# EAGLE board arena-shield (EAGLE 7.6.0)
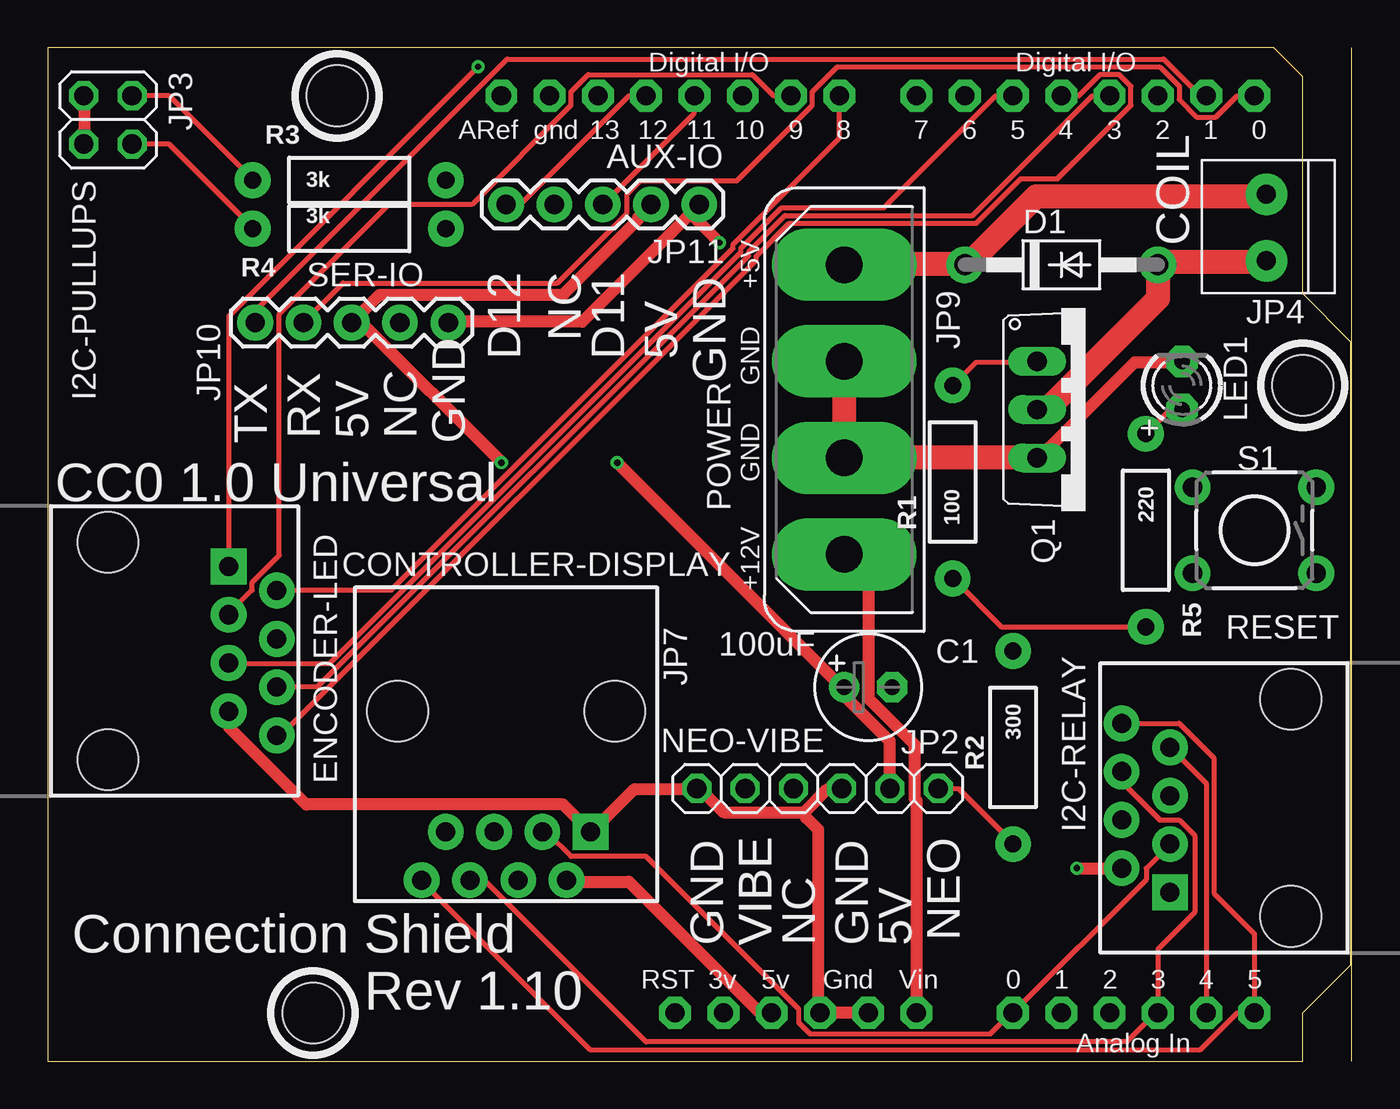
[diagram p0: board, top side]
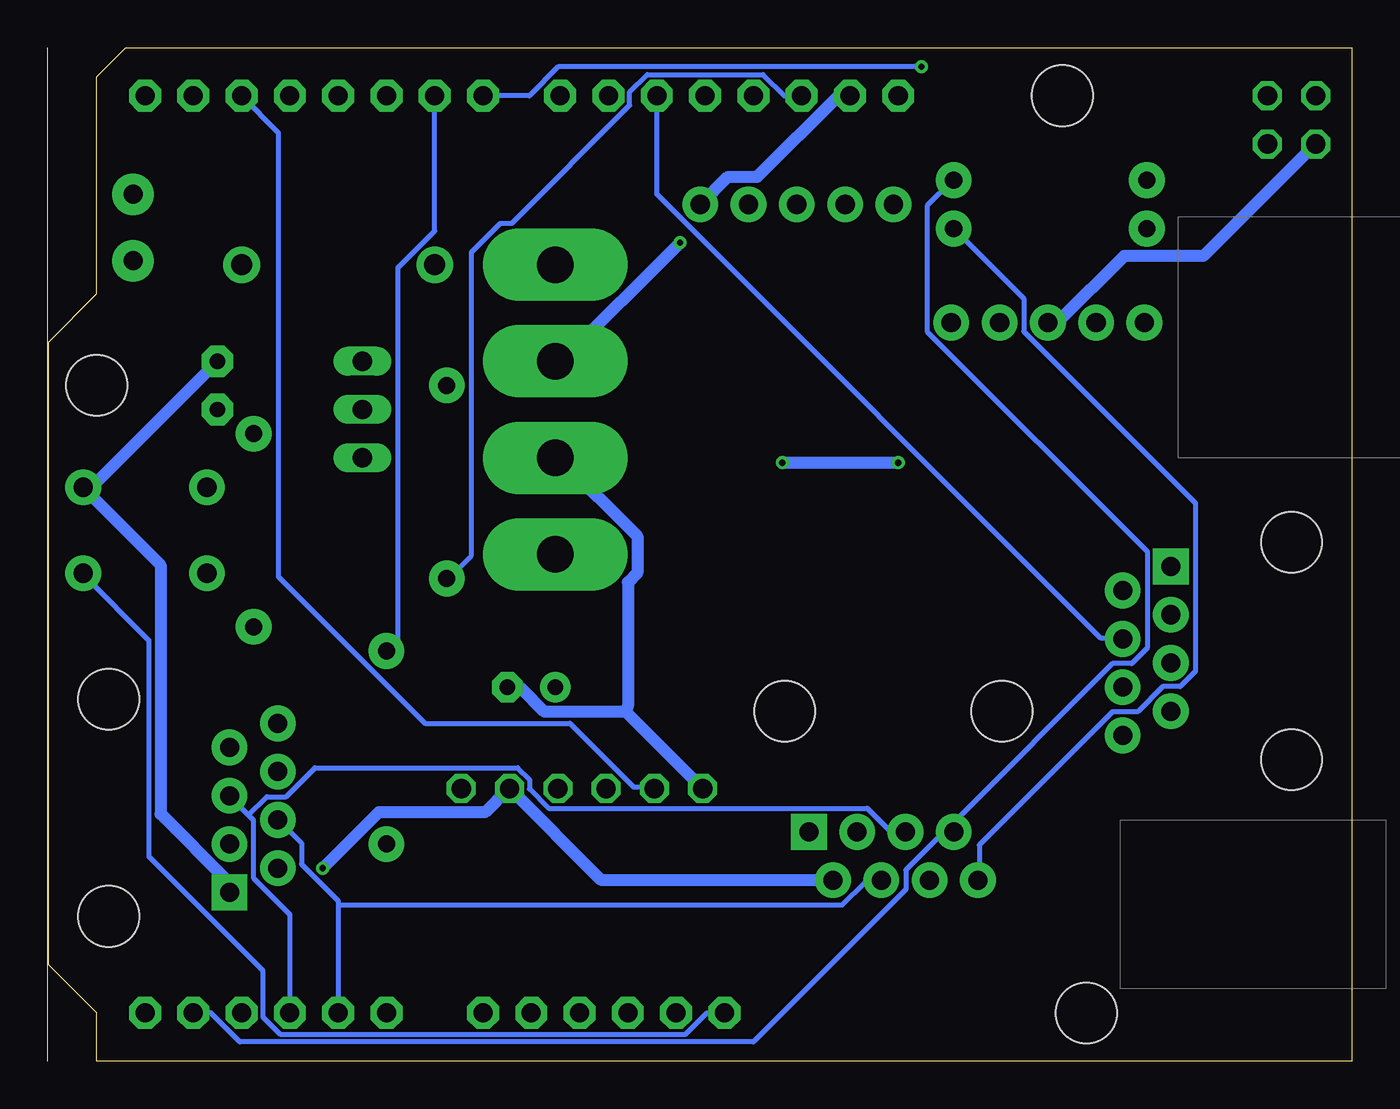
[diagram p1: board, bottom side, seen from below]

Size 68.63 x 53.34 mm. Coordinates in mm from the lower left corner, seen from the top.
Outline: 68.63,0 68.63,53.33
Outline: 0,53.33 0,0
Copper layers (1*16): Top 0.0356mm / dielectric 1.5011mm / Bottom 0.0356mm
Design rules "LaenPCBOrder": minimum track width 6mil, minimum drill 13mil, track to track 6mil, track to pad 6mil, pad to pad 6mil, via to via 6mil, smd to smd 6mil, copper to edge 15mil, drill to drill 6mil, minimum pad ring 7mil, minimum via ring 7mil, stop-mask expansion 3mil, vias tented up to drill 0mil, thermal gap 10mil
Net classes: 0 default: width 0.254 mm; 1 power: width 0.635 mm; 2 coil: width 1.27 mm

## Footprints (pad centres in the part's own frame; a part is rotated, then mirrored left to right if it is on the bottom)
E2,5-6 = drill 0.813 pad 1.6: + -1.27,0 | drill 0.813 pad 1.6 octagon: - 1.27,0
DO41-10 = drill 1.118 pad 1.93: A 5.08,0; C -5.08,0
1X06 = drill 1.016 octagon: 1 -6.35,0; 2 -3.81,0; 3 -1.27,0; 4 1.27,0; 5 3.81,0; 6 6.35,0
2X02 = drill 1.016 octagon: 1 -1.27,-1.27; 2 -1.27,1.27; 3 1.27,-1.27; 4 1.27,1.27
1X2-3.5MM = drill 1 pad 2.184: 1 1.8,0; 2 -1.7,0
RJ45-8 = drill 1 pad 1.88 square: 1 -4.445,6.35 | drill 1 pad 1.88: 2 -3.175,8.89; 3 -1.905,6.35; 4 -0.635,8.89; 5 0.635,6.35; 6 1.905,8.89; 7 3.175,6.35; 8 4.445,8.89 | hole 3.2: -5.715,0; 5.715,0
RJ45-UPRIGHT = drill 1 pad 1.88 square: 1 -4.445,5.08 | drill 1 pad 1.88: 2 -3.175,7.62; 3 -1.905,5.08; 4 -0.635,7.62; 5 0.635,5.08; 6 1.905,7.62; 7 3.175,5.08; 8 4.445,7.62 | hole 3.2: -5.715,-1.27; 5.715,-1.27
FLOPPY-4 = drill 1.93 pad 3.81 long: 1 7.62,0; 2 2.54,0; 3 -2.54,0; 4 -7.62,0
1X05 = drill 1.016 pad 1.88: 1 0,0; 2 2.54,0; 3 5.08,0; 4 7.62,0; 5 10.16,0
LED3MM = drill 0.813 pad 1.676 octagon: A -1.27,0; K 1.27,0
TO220V = drill 1.016 long: 1 -2.54,-2.54; 2 0,-2.54; 3 2.54,-2.54
AXIAL-0.4 = drill 0.9 pad 1.88: P$1 -5.08,0; P$2 5.08,0
TACTILE-PTH = drill 1.016 pad 1.88: 1 -3.251,2.261; 2 3.251,2.261; 3 -3.251,-2.261; 4 3.251,-2.261
ARDUINO = drill 1 pad 1.676 octagon: 3V 35.56,2.54; 5V 38.1,2.54; A0 50.8,2.54; A1 53.34,2.54; A2 55.88,2.54; A3 58.42,2.54; A4 60.96,2.54; A5 63.5,2.54; AREF 23.876,50.8; D0 63.5,50.8; D1 60.96,50.8; D2 58.42,50.8; D3 55.88,50.8; D4 53.34,50.8; D5 50.8,50.8; D6 48.26,50.8; D7 45.72,50.8; D8 41.656,50.8; D9 39.116,50.8; D10 36.576,50.8; D11 34.036,50.8; D12 31.496,50.8; D13 28.956,50.8; GND 26.416,50.8; GND1 43.18,2.54; GND2 40.64,2.54; RESET 33.02,2.54; VIN 45.72,2.54 | hole 3.2: 15.24,50.8; 66.04,35.56; 13.97,2.54

## Placement (x,y rotation side)
C1  100uF  [E2,5-6]  43.18,19.68 0 top
D1  1N4004  [DO41-10]  53.34,41.91 0 top
JP2  NEO-VIBE  [1X06]  40.51,14.35 0 top
JP3  I2C-PULLUPS  [2X02]  3.17,49.53 270 top
JP4  COIL  [1X2-3.5MM]  64.14,43.81 90 top
JP6  ENCODER-LED  [RJ45-8]  3.17,21.59 270 top
JP7  CONTROLLER-DISPLAY  [RJ45-UPRIGHT]  24.13,17.14 180 top
JP8  I2C-RELAY  [RJ45-8]  65.41,13.34 90 top
JP9  POWER  [FLOPPY-4]  41.91,34.29 90 top
JP10  SER-IO  [1X05]  21.08,38.86 180 top
JP11  AUX-IO  [1X05]  34.29,45.09 180 top
LED1  MAGNET  [LED3MM]  59.69,35.56 90 top
Q1  IRLB8721PbF  [TO220V]  54.61,34.29 270 top
R1  100  [AXIAL-0.4]  47.62,30.48 90 top
R2  300  [AXIAL-0.4]  50.8,16.51 270 top
R3  3k  [AXIAL-0.4]  15.88,46.35 0 top
R4  3k  [AXIAL-0.4]  15.88,43.81 0 top
R5  220  [AXIAL-0.4]  57.78,27.94 270 top
S1  RESET  [TACTILE-PTH]  63.5,27.94 180 top
U$1  ARDUINOUNO  [ARDUINO]  0,0 0 top

## Library data of the parts
C1 = rcl
D1 JP2 JP4 LED1 Q1 U$1 = adafruit
JP3 = pinhead
JP6 JP8 JP10 JP11 = SparkFun-Connectors
JP7 = PJS
JP9 = con-amp
R1-R5 = SparkFun-Resistors
S1 = SparkFun-Electromechanical

## Nets
3V: U$1.3V
12V_PS_POS [power]: JP9.4 U$1.VIN
+5V [power]: C1.+ JP2.5 JP3.1 JP3.3 JP7.2 JP8.2 JP10.3 JP11.2 U$1.5V
A0: JP7.3 JP8.3 U$1.A0
A1: JP7.4 JP8.4 U$1.A1
A2: JP7.5 JP8.5 U$1.A2
A3: JP7.6 JP8.6 U$1.A3
BLUE: JP6.4 U$1.D10
COIL_5V [coil]: D1.C JP4.1 JP9.1
COIL_RETURN [coil]: D1.A JP4.2 Q1.2
D11: JP11.3 U$1.D11
D12: JP11.5 U$1.D12
GND [power]: C1.- JP2.1 JP2.4 JP6.7 JP7.1 JP8.1 JP9.2 JP9.3 JP10.1 JP11.1 LED1.K Q1.3 S1.3 U$1.GND U$1.GND1 U$1.GND2
GREEN: JP6.3 U$1.D9
LED-SWITCH-COM: JP6.1 U$1.D7
N$6: R1.P$1 R5.P$2 U$1.D13
N$7: LED1.A R5.P$1
N$8: S1.1 U$1.RESET
N$9: JP3.4 R4.P$1
N$10: JP3.2 R3.P$1
N$17: Q1.1 R1.P$2
N$24: R2.P$1 U$1.D6
NEO-DATA: JP2.6 R2.P$2
PUSHBUTTON: JP6.5 U$1.D5
QUAD-A: JP6.8 U$1.D4
QUAD-B: JP6.6 U$1.D3
RED: JP6.2 U$1.D8
RX: JP10.4 U$1.D0
SCL: JP7.8 JP8.8 R4.P$2 U$1.A5
SDA: JP7.7 JP8.7 R3.P$2 U$1.A4
TX: JP10.5 U$1.D1
VIBRATE: JP2.2 U$1.D2

## Tracks (layer width: path | path; a pad name or v marks a point on that pad's centre or on a via)
12V_PS_POS
  Top 0.635: U$1.VIN 45.72,13.72 45.62,13.82 45.62,16.66 43.18,19.1 43.18,25.4 JP9.4
+5V  (via drill 0.33)
  Top 0.635: JP3.3 1.93,48.26 1.93,50.8 JP3.1 | JP11.2 31.7,45.01 31.09,44.4 31.09,44.3 27.13,40.34 17.48,40.34 JP10.3 16.46,38.91 v23.88,31.5 | U$1.5V 37.49,2.54 30.58,9.45 27.33,9.45 JP7.2 | JP2.5 44.3,14.43 44.3,16.87 41.96,19.2 41.96,19.61 C1.+ 41.66,19.81 v29.97,31.5 | v54.15,10.16 JP8.2
  Bottom 0.635: JP10.3 15.95,38.91 15.44,38.91 11.99,42.37 7.82,42.37 1.93,48.26 JP3.3 | v54.15,10.16 51.21,13.11 45.62,13.11 44.4,14.33 JP2.5 39.52,9.55 27.33,9.55 JP7.2 | v29.97,31.5 v23.88,31.5
A0
  Top 0.254: JP8.3 59.03,11.38 57.81,10.16 57.81,9.55 U$1.A0 50.7,2.54 49.58,1.42 40.13,1.42 39.52,2.03 39.52,2.74 31.5,10.77 27.53,10.77 26.31,11.99 26.11,11.99 JP7.3
A1
  Bottom 0.254: 53.34,8.23 53.34,8.43 55.27,10.36 55.27,11.48 56.49,12.7 JP8.4 | 53.34,8.23 U$1.A1 | 53.34,8.23 26.82,8.23 25.6,9.45 24.79,9.45 JP7.4
A2
  Bottom 0.254: U$1.A2 55.88,7.72 57.81,9.65 57.81,12.7 58.06,12.95 | 58.06,12.95 59.03,13.92 JP8.5 | 58.06,12.95 57.1,13.92 56.08,13.92 54.56,15.44 43.89,15.44 43.28,14.83 43.28,14.33 42.27,13.31 25.5,13.31 24.28,12.09 23.57,12.09 JP7.5
A3
  Top 0.254: JP8.6 56.59,15.24 56.59,14.63 58.52,12.7 59.54,12.7 60.35,11.89 60.35,7.82 58.42,5.89 U$1.A3 58.32,2.54 56.79,1.02 31.5,1.02 23.06,9.45 22.25,9.45 JP7.6
BLUE
  Bottom 0.254: U$1.D10 36.58,45.62 13.21,22.25 12.09,22.25 JP6.4
COIL_5V
  Top 1.27: JP9.1 41.96,41.96 48.26,41.96 D1.C 48.77,42.27 52.02,45.52 64.11,45.52 JP4.1
COIL_RETURN
  Top 1.27: Q1.2 52.12,34.34 52.63,34.34 58.42,40.13 D1.A 59.03,42.06 64.11,42.06 JP4.2
D11
  Top 0.254: U$1.D11 34.04,49.89 29.26,45.11 JP11.3
D12
  Top 0.254: U$1.D12 30.58,50.8 24.89,45.11 24.18,45.11 JP11.5
GND  (via drill 0.33)
  Top 0.635: U$1.GND1 U$1.GND2 40.54,2.85 40.54,12.19 39.93,12.8 39.83,13.11 | 39.83,13.11 41.05,14.33 41.76,14.33 JP2.4 | 39.83,13.11 35.56,13.11 34.44,14.22 JP2.1 34.14,14.33 30.89,14.33 28.65,12.09 JP7.1 27.13,13.51 13.61,13.51 9.55,17.58 9.55,18.39 JP6.7 | JP10.1 21.13,38.91 28.14,38.91 34.24,45.01 JP11.1 34.04,44.4 v35.36,43.08 | 52.02,31.8 Q1.3 52.32,31.9 57.2,36.78 59.64,36.78 LED1.K | 41.96,31.8 JP9.3 41.96,32.11 | 41.96,36.78 JP9.2
  Top 1.27: 41.96,36.78 41.91,36.78 JP9.3 | 41.96,31.8 52.07,31.8 Q1.3
  Bottom 0.635: 38.2,18.39 42.47,18.39 43.69,19.61 44.4,19.61 C1.- | JP2.1 38.2,18.39 | JP8.1 59.13,8.94 59.13,9.45 62.69,13.01 62.69,26.11 66.75,30.18 S1.3 66.34,30.18 LED1.K | U$1.GND 27.03,50.8 31.29,46.53 32.82,46.53 34.24,45.11 JP11.1 | v35.36,43.08 41.55,36.88 41.86,36.88 JP9.2 | 38.2,18.39 38.1,18.69 38.1,25.2 37.59,25.7 37.59,27.64 41.66,31.7 41.86,31.7 JP9.3
GREEN
  Top 0.254: U$1.D9 38.2,50.8 37.08,51.92 28.45,51.92 27.53,51 27.53,50.29 22.35,45.11 17.98,45.11 12.19,39.32 12.19,26.62 10.77,25.2 10.77,24.79 9.55,23.57 JP6.3
LED-SWITCH-COM  (via drill 0.33)
  Top 0.254: v22.66,52.32 9.55,39.22 9.55,26.11 JP6.1
  Bottom 0.254: U$1.D7 43.28,50.8 41.76,52.32 v22.66,52.32
N$6
  Top 0.254: R5.P$2 50.19,22.86 47.65,25.4 R1.P$1
  Bottom 0.254: U$1.D13 29.87,50.8 30.99,51.92 37.08,51.92 38,51 38,50.29 44.2,44.09 44.81,44.09 46.33,42.57 46.33,26.62 47.55,25.4 R1.P$1
N$7
  Top 0.254: LED1.A 59.64,34.24 59.03,34.24 57.81,33.02 R5.P$1
N$8
  Bottom 0.254: U$1.RESET 33.93,2.54 35.05,1.42 56.39,1.42 57.3,2.34 57.3,4.78 63.3,10.77 63.3,22.15 66.75,25.6 S1.1
N$9
  Top 0.254: JP3.4 6.4,48.26 10.77,43.89 R4.P$1
N$10
  Top 0.254: JP3.2 6.4,50.8 10.77,46.43 R3.P$1
N$17
  Top 0.254: Q1.1 52.02,36.78 48.87,36.78 47.65,35.56 R1.P$2
N$24
  Bottom 0.254: U$1.D6 48.26,43.69 50.19,41.76 50.19,22.25 50.8,21.64 R2.P$1
NEO-DATA
  Top 0.254: JP2.6 46.94,14.33 47.95,14.33 50.8,11.48 R2.P$2
PUSHBUTTON
  Top 0.254: U$1.D5 49.89,50.8 43.99,44.91 38.61,44.91 36.47,42.77 36.47,42.57 14.83,20.93 9.55,20.93 JP6.5
QUAD-A
  Top 0.254: U$1.D4 54.25,50.8 55.37,51.92 56.39,51.92 57,51.31 57,50.29 53.14,46.43 51.21,46.43 48.87,44.09 39.01,44.09 37.29,42.37 37.29,42.16 12.29,17.17 12.09,17.17 JP6.8
QUAD-B
  Top 0.254: U$1.D3 54.97,50.8 48.67,44.5 38.81,44.5 36.88,42.57 36.88,42.37 14.22,19.71 12.09,19.71 JP6.6
RED
  Top 0.254: U$1.D8 41.66,48.56 36.07,42.98 36.07,42.77 18.09,24.79 12.09,24.79 JP6.2
RX
  Top 0.254: U$1.D0 62.59,50.8 61.47,49.68 60.45,49.68 59.54,50.6 59.54,51.31 58.52,52.32 41.55,52.32 40.23,51 40.23,50.29 36.27,46.33 31.19,46.33 30.48,45.62 30.48,44.6 26.82,40.95 15.54,40.95 JP10.4
SCL
  Top 0.254: JP8.8 59.54,17.78 61.37,15.95 61.37,8.84 63.5,6.71 U$1.A5 62.59,2.54 60.66,0.61 28.55,0.61 19.71,9.45 JP7.8
  Bottom 0.254: R4.P$2 17.27,40.13 17.27,38.41 8.23,29.36 8.23,20.52 9.04,19.71 9.96,19.71 11.28,18.39 12.6,18.39 19.61,11.38 19.61,9.55 JP7.8
SDA
  Top 0.254: U$1.A4 60.96,14.63 59.13,16.46 JP8.7
  Bottom 0.254: R3.P$2 21.03,46.33 22.35,45.01 22.35,38.41 10.77,26.82 10.77,21.74 11.58,20.93 12.6,20.93 20.93,12.6 20.93,12.09 JP7.7 21.03,11.99 21.54,11.99 23.47,10.06 23.47,9.04 31.5,1.02 58.52,1.02 60.05,2.54 U$1.A4
TX
  Top 0.254: U$1.D1 60.66,50.8 58.73,52.73 24.18,52.73 10.97,39.52 10.97,38.91 JP10.5
VIBRATE
  Bottom 0.254: U$1.D2 56.49,48.87 56.49,25.5 48.77,17.78 41.15,17.78 37.8,14.43 36.78,14.43 JP2.2

## Text on the board
tNames: COIL | D12 | NC | D11 | GND | +5V | 5V | GND | TX | RX | 5V | NC | GND | GND | CC0 1.0 Universal | +12V | RESET | ENCODER-LED | I2C-RELAY | Connection Shield | GND | VIBE | VIBE | NC | GND | 5V | NEO | Rev 1.10